# EAGLE board protoBoardHB (EAGLE 9.2.2)
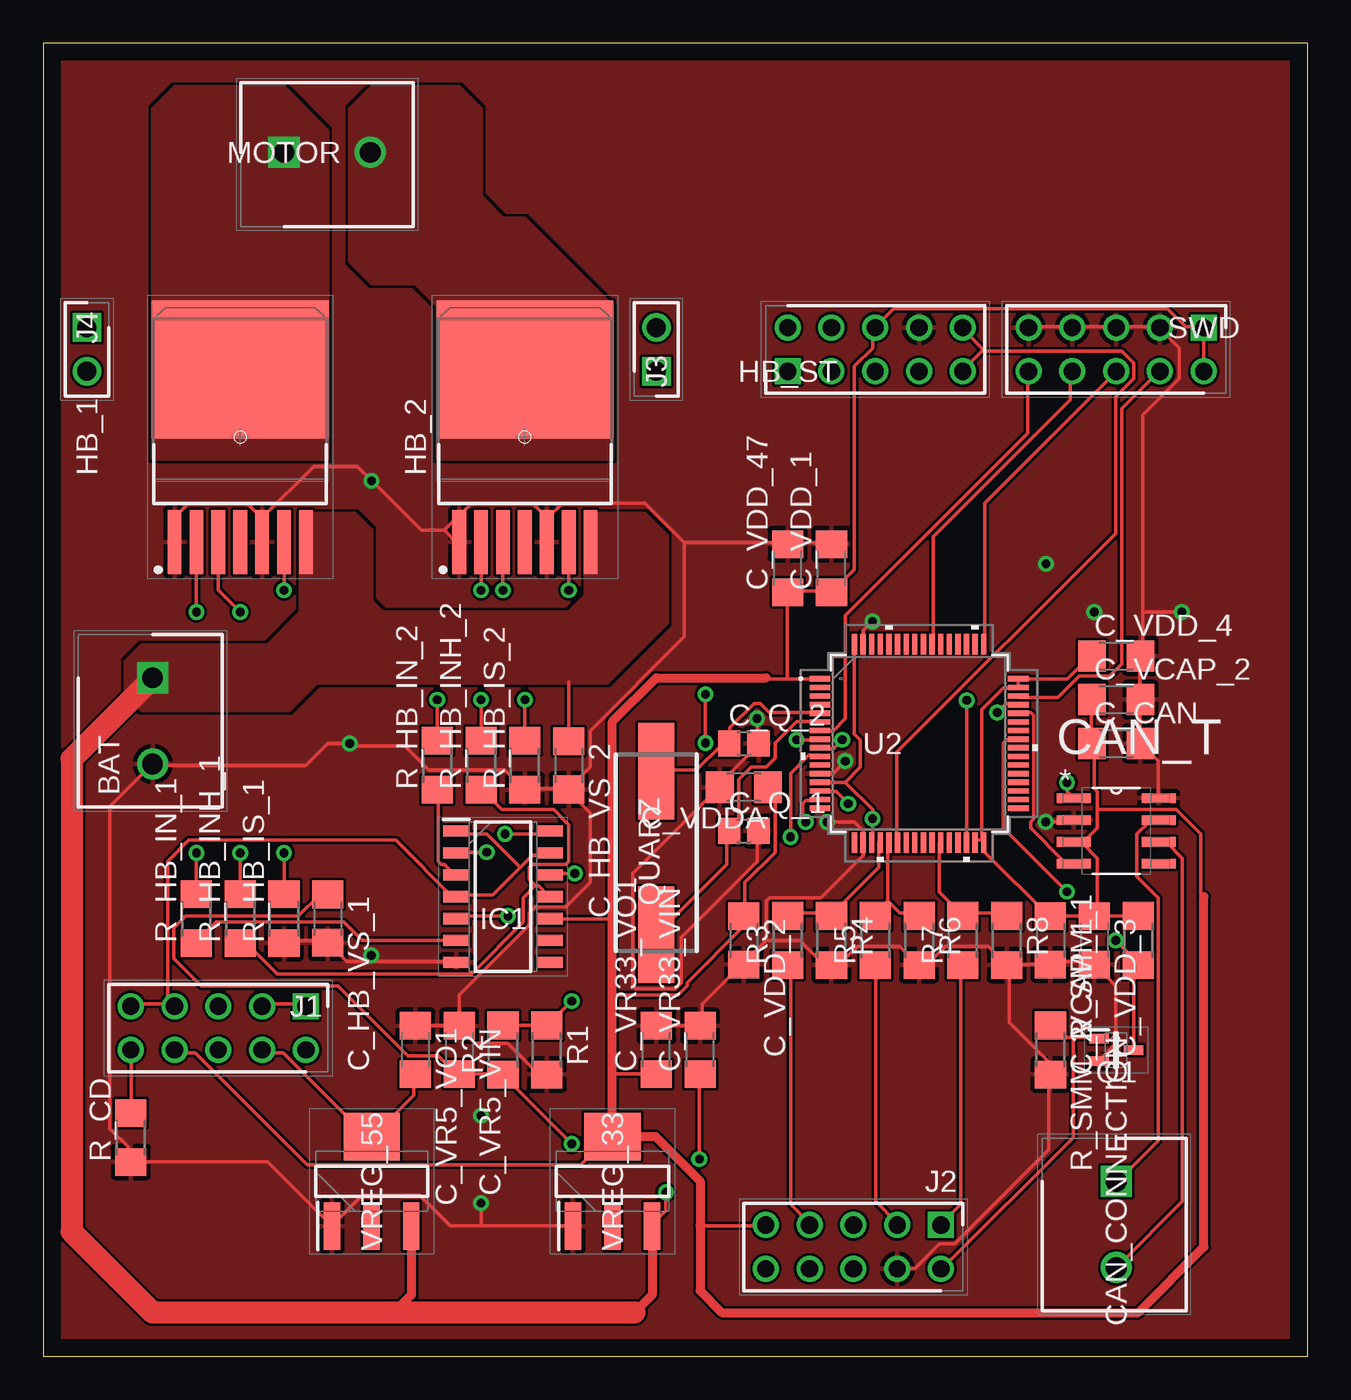
[diagram p0: board, top side]
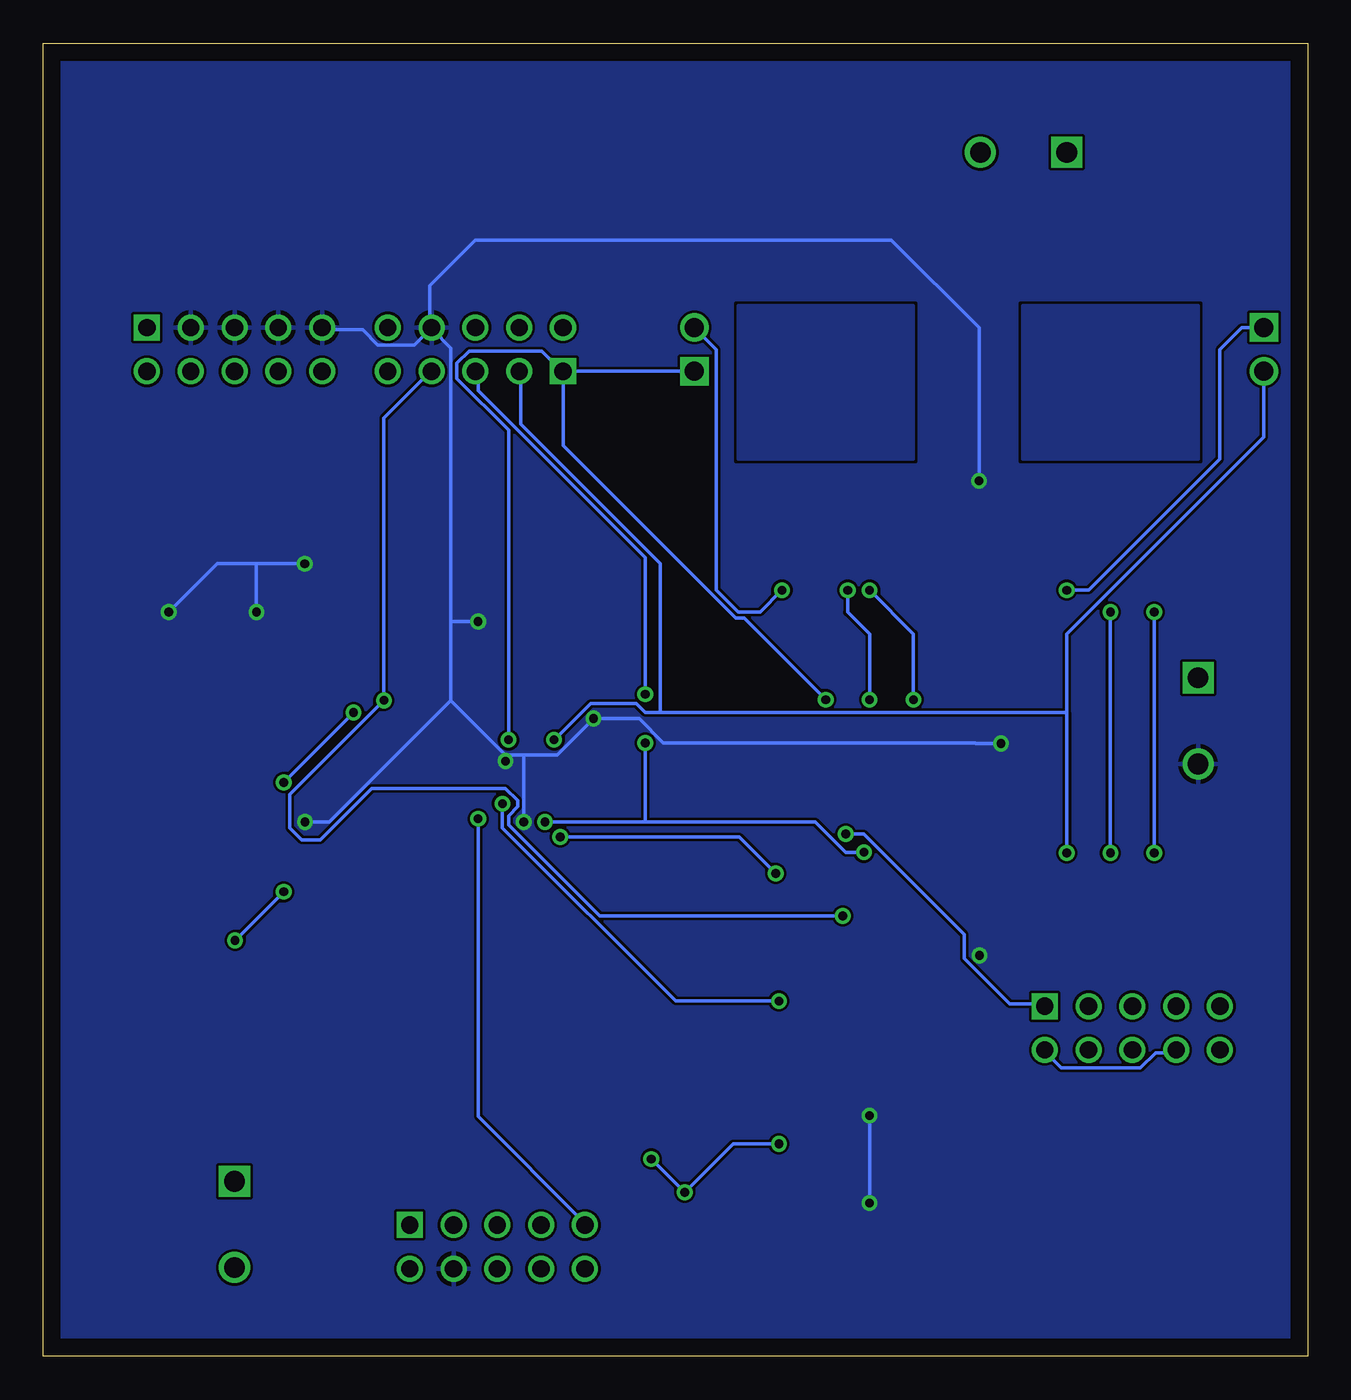
[diagram p1: board, bottom side, seen from below]

Size 73.33 x 76.19 mm. Coordinates in mm from the lower left corner, seen from the top.
Outline: 0,0 73.33,0 73.33,76.19 0,76.19 0,0
Copper layers (1*16): Top 0.035mm / dielectric 1.5mm / Bottom 0.035mm
Design rules "default": minimum track width 6mil, minimum drill 0.35mm, track to track 6mil, track to pad 6mil, pad to pad 6mil, via to via 6mil, smd to smd 6mil, copper to edge 40mil, drill to drill 6mil, minimum pad ring 10mil, minimum via ring 8mil, stop-mask expansion 4mil, vias tented up to drill 0mil, thermal gap 10mil
Net classes: 0 default: width 0.2 mm, drill 0.508 mm; 1 V12: width 0.6 mm, drill 0.8 mm

## Footprints (pad centres in the part's own frame; a part is rotated, then mirrored left to right if it is on the bottom)
SHDR2W100P0X500_1X2_1000X820X1 = drill 1.2 pad 1.8 square: 1 0,0 | drill 1.2 pad 1.8: 2 5,0
C1206 = smd 1.6 x 1.8: 1 -1.4,0; 2 1.4,0
C0805 = smd 1.3 x 1.5: 1 -0.85,0; 2 0.85,0
SOIC127P600X175-8N = smd 1.981 x 0.559: 1 -2.464,1.905; 2 -2.464,0.635; 3 -2.464,-0.635; 4 -2.464,-1.905; 5 2.464,-1.905; 6 2.464,-0.635; 7 2.464,0.635; 8 2.464,1.905
TO127P1500X440-8N = smd 3.7 x 0.8: 1 -6.1,3.81; 2 -6.1,2.54; 3 -6.1,1.27; 4 -6.1,0; 5 -6.1,-1.27; 6 -6.1,-2.54; 7 -6.1,-3.81 | smd 8 x 10.25: 8 3.9,0
HDRV10W80P254_2X5_1270X508X864 = drill 1 pad 1.5 square: 1 0,0 | drill 1 pad 1.5: 2 0,2.54; 3 2.54,0; 4 2.54,2.54; 5 5.08,0; 6 5.08,2.54; 7 7.62,0; 8 7.62,2.54; 9 10.16,0; 10 10.16,2.54
SOIC127P600X175-14N = smd 1.525 x 0.65: 1 -2.712,3.81; 2 -2.712,2.54; 3 -2.712,1.27; 4 -2.712,0; 5 -2.712,-1.27; 6 -2.712,-2.54; 7 -2.712,-3.81; 8 2.712,-3.81; 9 2.712,-2.54; 10 2.712,-1.27; 11 2.712,0; 12 2.712,1.27; 13 2.712,2.54; 14 2.712,3.81
HDRV2W64P0X254_1X2_508X254X864 = drill 1.1 pad 1.65 square: 1 0,0 | drill 1.1 pad 1.65: 2 2.54,0
SOT65P220X100-3N = smd 1.15 x 0.55: 1 -1,0.65; 2 -1,-0.65; 3 1,0
ABLS-12.000MHZ-B2 = smd 5.6 x 2.1: 1 -4.75,0; 2 4.75,0
R1206 = smd 1.6 x 1.803: 1 -1.422,0; 2 1.422,0
LQFP64-10X10MM = smd 1.194 x 0.305: 1 -5.75,3.75; 2 -5.75,3.25; 3 -5.75,2.75; 4 -5.75,2.25; 5 -5.75,1.75; 6 -5.75,1.25; 7 -5.75,0.75; 8 -5.75,0.25; 9 -5.75,-0.25; 10 -5.75,-0.75; 11 -5.75,-1.25; 12 -5.75,-1.75; 13 -5.75,-2.25; 14 -5.75,-2.75; 15 -5.75,-3.25; 16 -5.75,-3.75; 33 5.75,-3.75; 34 5.75,-3.25; 35 5.75,-2.75; 36 5.75,-2.25; 37 5.75,-1.75; 38 5.75,-1.25; 39 5.75,-0.75; 40 5.75,-0.25; 41 5.75,0.25; 42 5.75,0.75; 43 5.75,1.25; 44 5.75,1.75; 45 5.75,2.25; 46 5.75,2.75; 47 5.75,3.25; 48 5.75,3.75 | smd 0.305 x 1.194: 17 -3.75,-5.75; 18 -3.25,-5.75; 19 -2.75,-5.75; 20 -2.25,-5.75; 21 -1.75,-5.75; 22 -1.25,-5.75; 23 -0.75,-5.75; 24 -0.25,-5.75; 25 0.25,-5.75; 26 0.75,-5.75; 27 1.25,-5.75; 28 1.75,-5.75; 29 2.25,-5.75; 30 2.75,-5.75; 31 3.25,-5.75; 32 3.75,-5.75; 49 3.75,5.75; 50 3.25,5.75; 51 2.75,5.75; 52 2.25,5.75; 53 1.75,5.75; 54 1.25,5.75; 55 0.75,5.75; 56 0.25,5.75; 57 -0.25,5.75; 58 -0.75,5.75; 59 -1.25,5.75; 60 -1.75,5.75; 61 -2.25,5.75; 62 -2.75,5.75; 63 -3.25,5.75; 64 -3.75,5.75
SOT230P700X180-4N = smd 2.75 x 0.95: 1 -2.6,2.3; 2 -2.6,0; 3 -2.6,-2.3 | smd 2.75 x 3.25: 4 2.6,0

## Placement (x,y rotation side)
BAT  282836-2  [SHDR2W100P0X500_1X2_1000X820X1]  6.35,39.37 270 top
C_CAN  100nF  [C1206]  62.23,35.56 0 top
C_HB_VS_1  0.47uF  [C1206]  16.51,25.4 270 top
C_HB_VS_2  0.47uF  [C1206]  30.48,34.29 270 top
C_Q_1  22pF  [C0805]  40.64,30.48 0 top
C_Q_2  22pF  [C0805]  40.64,35.56 0 top
C_VCAP_1  2.2uF  [C1206]  58.42,24.13 270 top
C_VCAP_2  2.2uF  [C1206]  62.23,38.1 0 top
C_VDD_1  100nF  [C1206]  45.72,45.72 90 top
C_VDD_2  100nF  [C1206]  40.64,24.13 270 top
C_VDD_3  100nF  [C1206]  60.96,24.13 270 top
C_VDD_4  100nF  [C1206]  62.23,40.64 0 top
C_VDD_47  4.7nF  [C1206]  43.18,45.72 90 top
C_VDDA  100nF  [C1206]  40.64,33.02 180 top
C_VR5_VIN  1uF  [C1206]  24.13,17.78 270 top
C_VR5_VO1  4.7uF  [C1206]  21.59,17.78 270 top
C_VR33_VIN  1uF  [C1206]  38.1,17.78 90 top
C_VR33_VO1  4.7uF  [C1206]  35.56,17.78 90 top
CAN_CONNECTION  282836-2  [SHDR2W100P0X500_1X2_1000X820X1]  62.23,10.16 270 top
CAN_T  SN65HVD230QD  [SOIC127P600X175-8N]  62.23,30.48 0 top
HB_1  BTN8982TA  [TO127P1500X440-8N]  11.43,53.34 90 top
HB_2  BTN8982TA  [TO127P1500X440-8N]  27.94,53.34 90 top
HB_ST  M20-9980545  [HDRV10W80P254_2X5_1270X508X864]  43.18,57.15 0 top
IC1  CD74HCT125M  [SOIC127P600X175-14N]  26.67,26.67 0 top
J1  M20-9980545  [HDRV10W80P254_2X5_1270X508X864]  15.24,20.32 180 top
J2  M20-9980545  [HDRV10W80P254_2X5_1270X508X864]  52.07,7.62 180 top
J3  M20-9990246  [HDRV2W64P0X254_1X2_508X254X864]  35.56,57.15 90 top
J4  M20-9990246  [HDRV2W64P0X254_1X2_508X254X864]  2.54,59.69 270 top
MOTOR  282836-2  [SHDR2W100P0X500_1X2_1000X820X1]  13.97,69.85 0 top
Q1  SMMBT3904WT1G  [SOT65P220X100-3N]  62.23,17.78 0 top
QUARZ  ABLS-8.000MHZ-K4T  [ABLS-12.000MHZ-B2]  35.56,29.21 90 top
R1  [R1206]  29.21,17.78 270 top
R2  [R1206]  26.67,17.78 90 top
R3  [R1206]  43.18,24.13 90 top
R4  [R1206]  45.72,24.13 270 top
R5  [R1206]  48.26,24.13 90 top
R6  [R1206]  50.8,24.13 270 top
R7  [R1206]  53.34,24.13 90 top
R8  [R1206]  55.88,24.13 270 top
R_CD  1K  [R1206]  5.08,12.7 90 top
R_HB_IN_1  10K  [R1206]  8.89,25.4 90 top
R_HB_IN_2  10K  [R1206]  22.86,34.29 90 top
R_HB_INH_1  10K  [R1206]  11.43,25.4 90 top
R_HB_INH_2  10K  [R1206]  25.4,34.29 90 top
R_HB_IS_1  1k  [R1206]  13.97,25.4 90 top
R_HB_IS_2  1k  [R1206]  27.94,34.29 90 top
R_SMM_1  100K  [R1206]  63.5,24.13 270 top
R_SMM_2  100K  [R1206]  58.42,17.78 270 top
SWD  M20-9980545  [HDRV10W80P254_2X5_1270X508X864]  67.31,59.69 180 top
U2  STM32F4X5RG  [LQFP64-10X10MM]  50.8,35.56 0 top
VREG_33  LDL1117S33R  [SOT230P700X180-4N]  33.02,10.16 90 top
VREG_55  LDL1117S50R  [SOT230P700X180-4N]  19.05,10.16 90 top

## Library data of the parts
BAT CAN_CONNECTION MOTOR = SamacSys_Parts; DESCRIPTION: TERMINAL BLOCK, PCB MOUNT, SIDE WIRE ENTRY, STACKING , 5.00mm PITCH; HEIGHT: 10.2mm; MANUFACTURER_NAME: TE Connectivity; MANUFACTURER_PART_NUMBER: 282836-2; MOUSER_PART_NUMBER: 571-2828362
C_CAN C_HB_VS_1 C_HB_VS_2 C_Q_1 C_Q_2 C_VCAP_1 C_VCAP_2 C_VDD_1-C_VDD_4 C_VDD_47 C_VDDA C_VR5_VIN C_VR5_VO1 C_VR33_VIN C_VR33_VO1 R1-R8 R_CD R_HB_IN_1 R_HB_IN_2 R_HB_INH_1 R_HB_INH_2 R_HB_IS_1 R_HB_IS_2 R_SMM_1 R_SMM_2 = adafruit
CAN_T = ADP_Components; MF: TEXAS INSTRUMENTS; MPN: SN65HVD230QD..; OC_FARNELL: 1648752; OC_NEWARK: 75C7746; PACKAGE: SOIC-8; SUPPLIER: Texas Instruments
HB_1 HB_2 = SamacSys_Parts; DESCRIPTION: New Infineon BTN8982TA Motor Driver,, 7-Pin TO-263-7-1; HEIGHT: 4.4mm; MANUFACTURER_NAME: Infineon; MANUFACTURER_PART_NUMBER: BTN8982TA; MOUSER_PART_NUMBER: 726-BTN8982TA
HB_ST SWD = SamacSys_Parts; DESCRIPTION: M20 Header, Pin, Dil, Vertical, 5+5 W HARWIN M20 Series, 2.54mm Pitch 10 Way 2 Row Straight Pin Header, Through Hole, Solder Termination; HEIGHT: 8.64mm; MANUFACTURER_NAME: HARWIN; MANUFACTURER_PART_NUMBER: M20-9980545; MF: HARWIN; MOUSER_PART_NUMBER: 855-M20-9980545; MPN: M20-9980545; OC_FARNELL: 1022235
IC1 = SamacSys_Parts; DESCRIPTION: High Speed CMOS Logic Quad Buffers with 3-State Outputs; HEIGHT: 1.75mm; MANUFACTURER_NAME: Texas Instruments; MANUFACTURER_PART_NUMBER: CD74HCT125M; MOUSER_PART_NUMBER: 595-CD74HCT125M
J1 J2 = SamacSys_Parts; DESCRIPTION: M20 Header, Pin, Dil, Vertical, 5+5 W HARWIN M20 Series, 2.54mm Pitch 10 Way 2 Row Straight Pin Header, Through Hole, Solder Termination; HEIGHT: 8.64mm; MANUFACTURER_NAME: HARWIN; MANUFACTURER_PART_NUMBER: M20-9980545; MOUSER_PART_NUMBER: 855-M20-9980545
J3 J4 = SamacSys_Parts; DESCRIPTION: HARWIN M20-9990246. Board-To-Board Connector, Straight, 2.54 mm, 2 Contacts, Header, M20 Series, Through Hole; HEIGHT: 8.64mm; MANUFACTURER_NAME: HARWIN; MANUFACTURER_PART_NUMBER: M20-9990246; MOUSER_PART_NUMBER: 855-M20-9990246
Q1 = SamacSys_Parts; DESCRIPTION: ON SEMICONDUCTOR - SMMBT3904WT1G - TRANSISTOR, AEC-Q101, NPN, 40V, SOT-323; HEIGHT: 1mm; MANUFACTURER_NAME: ON Semiconductor; MANUFACTURER_PART_NUMBER: SMMBT3904WT1G; MOUSER_PART_NUMBER: 863-SMMBT3904WT1G
QUARZ = SamacSys_Parts; DESCRIPTION: ABRACON - ABLS-8.000MHZ-K4T - CRYSTAL, 8MHZ, 18PF, HC-49US; HEIGHT: mm; MANUFACTURER_NAME: ABRACON; MANUFACTURER_PART_NUMBER: ABLS-8.000MHZ-K4T; MF: ABRACON; MOUSER_PART_NUMBER: 815-ABLS-8.0MK4-T; MPN: ABLS-8.000MHZ-K4T; OC_FARNELL: 2467758
U2 = ADP_Components; MANUFACTURER_PART_NUMBER: STM32F4X5RG; OC_FARNELL: unknown; VENDOR: STMicroelectronics
VREG_33 = SamacSys_Parts; DESCRIPTION: STMICROELECTRONICS - LDL1117S33R - LDO, FIXED, 3.3V, 1.2A, SOT-223-3; HEIGHT: 1.8mm; MANUFACTURER_NAME: STMicroelectronics; MANUFACTURER_PART_NUMBER: LDL1117S33R; MF: STMICROELECTRONICS; MOUSER_PART_NUMBER: 511-LDL1117S33R; MPN: LDL1117S33R; OC_FARNELL: 2729708
VREG_55 = SamacSys_Parts; DESCRIPTION: STMICROELECTRONICS - LDL1117S50R - LDO, FIXED, 5V, 1.2A, SOT-223-3; HEIGHT: 1.8mm; MANUFACTURER_NAME: STMicroelectronics; MANUFACTURER_PART_NUMBER: LDL1117S50R; MF: STMICROELECTRONICS; MOUSER_PART_NUMBER: 511-LDL1117S50R; MPN: LDL1117S50R; OC_FARNELL: 2729709

## Nets
CAN1_RX: CAN_T.4 U2.44
CAN1_TX: CAN_T.1 U2.45
CANH: CAN_CONNECTION.1 CAN_T.7
CANL: CAN_CONNECTION.2 CAN_T.6
CD_EN: IC1.1 IC1.4 IC1.13 J1.7 J1.9
CD_VCC: IC1.14 J1.1 J1.3
GND: BAT.2 C_CAN.2 C_HB_VS_1.2 C_HB_VS_2.2 C_Q_1.2 C_Q_2.2 C_VCAP_1.2 C_VCAP_2.2 C_VDD_1.2 C_VDD_2.2 C_VDD_3.2 C_VDD_4.2 C_VDD_47.2 C_VDDA.2 C_VR5_VIN.1 C_VR5_VO1.1 C_VR33_VIN.2 C_VR33_VO1.2 CAN_T.2 CAN_T.8 HB_1.1 HB_1.5 HB_2.1 HB_2.5 HB_ST.8 IC1.7 J2.4 Q1.2 R1.2 R4.2 R6.2 R8.2 R_CD.1 R_HB_IS_1.1 R_HB_IS_2.1 R_SMM_2.2 SWD.3 SWD.5 SWD.7 SWD.9 U2.12 U2.18 U2.63 VREG_33.1 VREG_55.1
IN_1: IC1.6 R_HB_IN_1.1
IN_2: IC1.3 R_HB_IN_2.1
IN_M_1: HB_ST.7 IC1.5 U2.30
IN_M_2: HB_ST.5 IC1.2 U2.15
INH: IC1.11 R_HB_INH_1.1 R_HB_INH_2.1
INH_EXT: HB_ST.9 HB_ST.10 U2.22
INH_M: IC1.12 U2.10
IS_1: HB_ST.3 J4.2 R_HB_IS_1.2 U2.8
IS_2: HB_ST.1 J3.1 R_HB_IS_2.2 U2.9
N$1: J1.10 R_CD.2
N$2: HB_2.6 J3.2
N$3: HB_1.2 R_HB_IN_1.2
N$4: HB_1.3 R_HB_INH_1.2
N$5: HB_2.2 R_HB_IN_2.2
N$6: HB_2.3 R_HB_INH_2.2
N$7: HB_1.6 J4.1
N$8: HB_ST.2
N$9: HB_ST.4
N$15: J2.6
N$16: J2.8
N$17: J2.10
NRST: SWD.10 U2.7
OSC_IN: C_Q_2.1 QUARZ.2 U2.5
OSC_OUT: C_Q_1.1 QUARZ.1 U2.6
OUT_PA4: J2.7 R3.1
OUT_PA5: J2.3 R5.1
OUT_PA6: J2.5
OUT_PB1: J2.1 R7.1
PA0: R1.1 R2.2 U2.14
PA4: R3.2 R4.1 U2.20
PA5: R5.2 R6.1 U2.21
PA8: Q1.3 R_SMM_1.2 U2.41
PB1: R7.2 R8.1 U2.27
SS_VN: J2.2 Q1.1 R_SMM_2.1
SWCLK: SWD.6 U2.49
SWDIO: SWD.4 U2.46
TRACESWO: SWD.8 U2.55
V5: C_VR5_VO1.2 J1.4 VREG_55.4
V12: BAT.1 C_HB_VS_1.1 C_HB_VS_2.1 C_VR5_VIN.2 C_VR33_VIN.1 HB_1.7 HB_2.7 R2.1 VREG_33.3 VREG_55.3
V33: C_CAN.1 C_VCAP_1.1 C_VCAP_2.1 C_VDD_1.1 C_VDD_2.1 C_VDD_3.1 C_VDD_4.1 C_VDD_47.1 C_VDDA.1 C_VR33_VO1.1 CAN_T.3 HB_ST.6 IC1.10 J1.2 J1.8 J2.9 R_SMM_1.1 SWD.1 SWD.2 U2.1 U2.13 U2.19 U2.31 U2.32 U2.47 U2.48 U2.64 VREG_33.4
V_MOT_MIN: HB_2.8 MOTOR.2
V_MOT_PL: HB_1.8 MOTOR.1

## Tracks (layer width: path | path; a pad name or v marks a point on that pad's centre or on a via)
CAN1_RX
  Top 0.2: U2.44 56.56,37.35 57.27,37.35 57.44,37.18 57.44,31.19 57.27,31.01 57.27,30.66 59.2,28.72 59.73,28.72 CAN_T.4
CAN1_TX  (via drill 0.51)
  Top 0.2: v55.33,37.35 55.85,37.88 56.38,37.88 U2.45 | v59.38,33.3 59.38,32.77 59.73,32.42 CAN_T.1
  Bottom 0.2: v59.38,33.3 v55.33,37.35
CANH
  Top 0.2: CAN_T.7 64.67,31.01 64.14,31.01 63.43,30.31 63.43,27.84 64.67,26.61 64.67,12.51 62.38,10.22 CAN_CONNECTION.1
CANL
  Top 0.2: CAN_T.6 64.84,29.78 65.19,29.78 66.08,28.9 66.08,8.99 62.38,5.29 CAN_CONNECTION.2
CD_EN
  Top 0.2: 7.22,20.44 7.58,20.44 J1.7 7.22,20.44 | 7.22,20.44 5.11,20.44 J1.9 | 27.66,28.37 28.37,29.07 29.25,29.07 IC1.13 | 27.66,28.37 26.08,26.78 23.96,26.78 IC1.4 23.79,26.61 20.44,29.95 8.46,29.95 7.22,28.72 7.22,20.44 | 27.66,28.37 25.73,30.31 23.96,30.31 IC1.1
CD_VCC  (via drill 0.51)
  Top 0.2: v26.78,30.31 29.25,30.31 IC1.14 | J1.3 12.86,20.44 15.15,20.44 J1.1
  Bottom 0.2: v26.78,30.31 25.73,30.31 19.91,24.49 19.91,23.08 17.27,20.44 15.33,20.44 J1.1
GND  (via drill 0.51)
  Top 0.2: 12.69,48.63 11.8,49.51 8.46,49.51 7.75,48.81 7.75,47.4 HB_1.1 | 12.69,48.63 12.69,47.4 HB_1.5 12.69,48.63 | HB_2.1 23.96,47.22 23.26,47.93 24.84,49.51 28.37,49.51 29.25,48.63 | C_VDD_1.2 45.64,47.22 43.34,47.22 C_VDD_47.2 43.17,47.22 37.18,47.22 | 37.18,47.22 34.89,49.51 30.13,49.51 29.25,48.63 | 29.25,48.63 29.25,47.4 HB_2.5 29.25,48.63 | 12.69,48.63 15.68,51.63 | 16.74,7.58 13.04,11.28 5.11,11.28 R_CD.1 4.93,11.45 4.93,12.16 3.88,13.21 3.88,31.89 BAT.2 6.52,34.53 | 16.74,7.58 18.5,9.34 21.85,9.34 23.61,7.58 25.4,7.58 30.66,7.58 VREG_33.1 | 16.74,7.58 VREG_55.1 | 19.03,22.91 17.62,22.91 16.56,23.96 C_HB_VS_1.2 16.39,24.14 14.1,24.14 R_HB_IS_1.1 | 19.03,22.91 23.79,22.91 IC1.7 | C_VR5_VO1.1 21.67,19.21 23.96,19.21 C_VR5_VIN.1 | R1.2 29.07,16.39 28.72,16.39 26.96,18.15 25.02,18.15 24.14,19.03 C_VR5_VIN.1 | 20.97,35.42 22.38,34.01 26.78,34.01 27.84,32.95 R_HB_IS_2.1 28.02,32.95 30.31,32.95 C_HB_VS_2.2 | C_VR5_VIN.1 24.14,19.21 24.14,20.97 28.19,25.02 28.19,25.73 28.54,26.08 30.31,26.08 31.72,27.49 31.72,31.54 30.48,32.77 C_HB_VS_2.2 | v19.03,23.26 19.03,22.91 | 37.18,47.22 37.18,41.76 31.72,36.3 31.72,34.18 30.48,32.95 C_HB_VS_2.2 | C_VR33_VO1.2 35.59,19.21 38.06,19.21 C_VR33_VIN.2 38.23,19.21 38.23,20.44 40.53,22.73 C_VDD_2.2 40.7,22.91 41.94,24.14 | 41.94,24.14 41.94,26.43 42.11,26.61 45.11,26.61 47.57,29.07 47.57,29.78 U2.18 47.57,29.95 47.57,30.48 47.05,31.01 v45.46,31.01 | 41.94,24.14 43.87,24.14 45.28,22.73 45.64,22.73 R4.2 45.81,22.73 46.16,22.73 47.22,23.79 49.69,23.79 50.75,22.73 R6.2 50.92,22.73 51.27,22.73 52.33,23.79 54.8,23.79 55.85,22.73 R8.2
  Top 0.2: Q1.2 61.32,17.27 62.2,18.15 62.2,21.5 C_VDD_3.2 60.79,22.91 58.5,22.91 C_VCAP_1.2 58.32,22.73 56.03,22.73 R8.2 | R8.2 56.03,22.55 56.03,19.38 58.32,17.09 58.32,16.39 R_SMM_2.2 58.32,16.21 58.32,11.98 52.86,6.52 51.98,6.52 50.57,5.11 49.69,5.11 J2.4 | CAN_T.8 64.67,32.42 64.67,34.53 63.78,35.42 C_CAN.2 63.61,35.59 63.61,38.06 C_VCAP_2.2 63.61,38.23 63.61,40.53 C_VDD_4.2 63.78,40.7 63.78,43.18 63.78,54.62 65.9,56.74 65.9,58.5 64.84,59.56 SWD.3 64.67,59.73 62.38,59.73 SWD.5 62.2,59.73 59.73,59.73 SWD.7 59.56,59.73 57.27,59.73 SWD.9 | C_Q_1.2 41.41,30.31 41.41,28.72 37,24.32 37,21.67 36.65,21.32 34.36,21.32 34.18,21.5 34.18,28.02 39.12,32.95 C_VDDA.2 39.12,33.13 41.41,35.42 C_Q_2.2 41.41,35.59 v41.41,37 | v46.52,34.53 45.81,33.83 45.11,33.83 U2.12 | v48.1,42.64 47.57,42.11 47.57,41.41 U2.63 | v58.15,31.01 59.73,31.01 CAN_T.2
  Top 0.203: 15.68,51.63 18.22,51.63 v19.05,50.8 21.92,47.93 23.26,47.93 | BAT.2 6.43,34.29 15.24,34.29 16.51,35.56 v17.78,35.56 17.92,35.42 20.97,35.42 | 63.78,43.18 v66.04,43.18 | 25.4,7.58 v25.4,8.89
  Bottom 0.2: 49.69,38.06 46.52,34.89 | 49.69,42.64 49.69,58.5 50.75,59.56 HB_ST.8 50.92,59.56 51.8,58.67 53.92,58.67 54.8,59.56 57.09,59.56 SWD.9 | 49.69,42.64 49.69,38.06 | 49.69,42.64 v48.1,42.64 | v58.15,31.01 56.74,31.01 49.69,38.06 | 46.52,34.89 45.46,34.89 | 45.46,34.89 43.52,34.89 v41.41,37 38.76,37 37.35,35.59 | 46.52,34.89 v46.52,34.53 | 45.46,34.89 v45.46,31.01
  Bottom 0.203: 37.35,35.59 19.27,35.59 19.24,35.56 v17.78,35.56 | 50.92,59.56 50.92,62.11 48.26,64.77 24.13,64.77 19.05,59.69 v19.05,50.8 | v66.04,43.18 63.24,45.98 60.96,45.98 | 60.96,45.98 v58.16,45.98 | v25.4,8.89 v25.4,13.97 | 60.96,45.98 v60.96,43.18
  pour Top (rank 2): -1.27,77.47 -1.27,-1.27 74.93,-1.27 74.93,77.47
  pour Bottom (rank 2): -2.54,78.74 -2.54,-2.54 76.2,-2.54 76.2,78.74
IN_1
  Top 0.2: IC1.6 23.79,24.14 18.5,24.14 17.44,25.2 10.04,25.2 8.99,24.14 R_HB_IN_1.1
IN_2
  Top 0.2: IC1.3 23.79,28.02 23.26,28.54 23.08,28.54 22.91,28.72 22.91,32.77 R_HB_IN_2.1
IN_M_1  (via drill 0.51)
  Top 0.2: v53.56,38.06 53.56,29.95 U2.30 | v26.96,25.55 23.96,25.55 IC1.5
  Bottom 0.2: HB_ST.7 50.92,57.09 53.56,54.45 v53.56,38.06 59.03,32.6 59.03,30.66 58.32,29.95 57.27,29.95 54.27,32.95 46.52,32.95 45.81,32.24 45.81,31.89 46.34,31.36 46.34,30.84 41.05,25.55 v26.96,25.55
IN_M_2  (via drill 0.51)
  Top 0.2: v44.23,31.01 44.05,31.19 44.05,32.07 44.23,32.24 44.93,32.24 U2.15 | v25.73,29.25 23.96,29.25 IC1.2 | v38.41,35.59 v38.41,38.41
  Bottom 0.2: 38.41,31.01 28.54,31.01 26.78,29.25 v25.73,29.25 | 38.41,31.01 v44.23,31.01 | v38.41,38.41 38.41,46.34 48.1,56.03 48.1,57.09 HB_ST.5 | 38.41,31.01 v38.41,35.59
INH
  Top 0.2: 28.54,27.31 28.72,27.31 29.25,26.78 IC1.11 | 28.54,27.31 28.19,27.66 28.19,28.37 28.37,28.54 30.31,28.54 30.48,28.72 30.48,30.84 29.6,31.72 26.61,31.72 25.55,32.77 R_HB_INH_2.1 | 28.54,27.31 27.84,26.61 27.84,25.2 24.84,22.2 13.57,22.2 11.8,23.96 11.45,23.96 R_HB_INH_1.1
INH_EXT
  Top 0.2: 54.62,58.32 54.45,58.32 53.39,57.27 HB_ST.9 | 54.62,58.32 62.55,58.32 63.26,57.62 63.26,56.74 62.2,55.68 62.2,47.75 49.51,35.06 49.51,29.95 U2.22 | 54.62,58.32 53.39,59.56 HB_ST.10
INH_M  (via drill 0.51)
  Top 0.2: v43.34,30.13 43.34,33.83 44.4,34.89 44.93,34.89 U2.10 | v30.84,28.02 29.43,28.02 IC1.12
  Bottom 0.2: v43.34,30.13 32.95,30.13 v30.84,28.02
IS_1  (via drill 0.51)
  Top 0.2: v43.7,35.77 44.93,35.77 U2.8
  Top 0.203: v13.97,29.21 R_HB_IS_1.2
  Bottom 0.2: v43.7,35.77 41.58,37.88 38.94,37.88 38.41,37.35 37.53,37.35 | 37.53,37.35 13.97,37.35 13.97,41.91 2.54,53.34 J4.2 | 37.53,37.35 37.53,45.99 45.64,54.09 45.64,57.09 HB_ST.3
  Bottom 0.203: 13.97,37.35 v13.97,29.21
IS_2  (via drill 0.51)
  Top 0.2: v46.34,35.77 45.81,35.24 45.11,35.24 U2.9
  Top 0.203: v27.94,38.1 R_HB_IS_2.2
  Bottom 0.2: v46.34,35.77 46.34,53.74 49.34,56.74 49.34,57.62 48.63,58.32 44.4,58.32 43.34,57.27 HB_ST.1 | 43.17,57.09 HB_ST.1 | J3.1 HB_ST.1 | v27.94,38.1 32.67,42.83 33.17,42.83 43.18,52.84 HB_ST.1
N$1
  Top 0.2: R_CD.2 5.11,14.27 5.11,17.62 J1.10
N$2  (via drill 0.51)
  Top 0.2: HB_2.6 v30.48,44.45
  Bottom 0.2: v30.48,44.45 31.75,43.18 33.02,43.18 34.29,44.45 34.29,58.42 J3.2
N$3  (via drill 0.51)
  Top 0.203: R_HB_IN_1.2 v8.89,29.21 | v8.89,43.18 HB_1.2
  Bottom 0.203: v8.89,29.21 v8.89,43.18
N$4  (via drill 0.51)
  Top 0.203: R_HB_INH_1.2 v11.43,29.21 | v11.43,43.18 10.16,44.45 HB_1.3
  Bottom 0.203: v11.43,29.21 v11.43,43.18
N$5  (via drill 0.51)
  Top 0.203: HB_2.2 v25.4,44.45 | v22.86,38.1 R_HB_IN_2.2
  Bottom 0.203: v25.4,44.45 22.86,41.91 v22.86,38.1
N$6  (via drill 0.51)
  Top 0.203: HB_2.3 v26.67,44.45 | v25.4,38.1 R_HB_INH_2.2
  Bottom 0.203: v26.67,44.45 26.67,43.18 25.4,41.91 v25.4,38.1
N$7  (via drill 0.51)
  Top 0.2: HB_1.6 v13.97,44.45
  Bottom 0.2: v13.97,44.45 12.7,44.45 5.08,52.07 5.08,58.42 3.81,59.69 J4.1
NRST
  Top 0.2: U2.7 45.11,36.3 45.81,36.3 46.52,37 46.52,42.99 57.09,53.56 57.09,57.09 SWD.10
OSC_IN
  Top 0.2: U2.5 44.93,37.35 42.11,37.35 41.58,37.88 41.23,37.88 39.82,36.47 39.82,35.59 C_Q_2.1 39.65,35.42 39.29,35.42 37.88,34.01 35.59,34.01 QUARZ.2
OSC_OUT
  Top 0.2: U2.6 44.93,36.83 43.7,36.83 42.46,35.59 42.46,34.71 41.94,34.18 41.05,34.18 40.35,33.48 40.35,31.01 39.82,30.48 C_Q_1.1 39.65,30.31 39.65,28.54 35.59,24.49 QUARZ.1
OUT_PA4
  Top 0.2: R3.1 43.34,22.55 43.34,8.81 44.4,7.75 J2.7
OUT_PA5
  Top 0.2: R5.1 48.28,22.55 48.28,8.99 49.51,7.75 J2.3
OUT_PB1
  Top 0.2: R7.1 53.21,22.55 53.21,8.81 52.16,7.75 J2.1
PA0  (via drill 0.51)
  Top 0.2: v46.69,32.07 45.99,32.77 45.11,32.77 U2.14 | v30.66,20.61 29.25,19.21 R1.1 29.07,19.21 26.78,19.21 R2.2
  Bottom 0.2: v46.69,32.07 46.69,30.66 36.65,20.61 v30.66,20.61
PA4
  Top 0.2: U2.20 48.45,29.78 48.45,28.37 45.81,25.73 R4.1 45.64,25.73 43.34,25.73 R3.2
PA5
  Top 0.2: 48.98,26.43 48.98,29.78 U2.21 | 48.98,26.43 48.28,25.73 R5.2 | 48.98,26.43 49.69,25.73 50.75,25.73 R6.1
PA8  (via drill 0.51)
  Top 0.2: Q1.3 63.26,17.8 63.26,22.38 63.43,22.55 R_SMM_1.2 63.61,22.73 v62.2,24.14 | v59.38,26.96 55.68,30.66 55.68,35.59 55.85,35.77 56.38,35.77 U2.41
  Bottom 0.2: v62.2,24.14 v59.38,26.96
PB1
  Top 0.2: U2.27 51.98,29.78 51.98,26.96 53.21,25.73 R7.2 53.39,25.73 55.85,25.73 R8.1
SS_VN
  Top 0.2: 59.73,18.5 59.03,18.5 58.5,19.03 R_SMM_2.1 | 59.73,18.5 61.14,18.5 Q1.1 | 59.73,18.5 59.73,12.69 52.16,5.11 J2.2
SWCLK
  Top 0.2: U2.49 54.62,41.41 54.62,49.51 62.2,57.09 SWD.6
SWDIO
  Top 0.2: U2.46 56.56,38.23 58.85,38.23 60.08,39.47 61.85,39.47 62.55,40.17 62.55,54.97 64.67,57.09 SWD.4
TRACESWO
  Top 0.2: U2.55 51.63,41.41 51.63,47.57 59.56,55.5 59.56,57.09 SWD.8
V5
  Top 0.2: C_VR5_VO1.2 21.5,16.21 21.5,15.15 19.21,12.86 VREG_55.4 19.03,12.86 18.68,12.86 13.92,17.62 12.86,17.62 J1.4
V12  (via drill 0.51)
  Top 0.2: C_HB_VS_1.1 16.39,26.78 16.03,26.78 14.8,25.55 8.28,25.55 7.58,24.84 7.58,23.08 9.16,21.5 17.09,21.5 21.14,17.44 22.91,17.44 23.96,16.39 C_VR5_VIN.2 26.61,16.39 R2.1 26.78,16.21 v30.66,12.33 | v38.06,11.45 38.06,16.21 C_VR33_VIN.1 | v36.12,9.52 36.12,8.46 35.42,7.75 VREG_33.3 | 30.48,39.12 30.48,35.77 C_HB_VS_2.1
  Top 0.508: VREG_33.3 35.32,3.57 34.29,2.54 | VREG_55.3 21.35,3.57 20.32,2.54
  Top 1.27: BAT.1 1.65,34.67 1.65,7.24 6.35,2.54 20.32,2.54 34.29,2.54
  Bottom 0.2: v38.06,11.45 v36.12,9.52 33.3,12.33 v30.66,12.33
  pour Top (isolate 0.025, no thermals): 14.92,48.9 14.92,43.18 13.02,41.27 5.71,41.27 4.76,40.32 4.76,38.42 5.71,37.47 14.29,37.47 15.88,39.05 32.7,39.05 36.2,42.55 36.2,47.62 34.92,48.9 31.75,48.9 31.43,48.58 31.43,44.13 30.48,43.18 19.68,43.18 19.05,43.81 19.05,47.94 18.1,48.9
V33  (via drill 0.51)
  Top 0.2: 56.56,39.29 56.56,38.94 U2.47 56.38,38.76 55.68,38.76 54.45,37.53 54.45,29.95 | 56.56,39.29 59.38,39.29 60.79,40.7 C_VDD_4.1 | 56.56,39.29 U2.48 | C_VCAP_2.1 60.79,38.06 60.79,35.59 C_CAN.1 60.97,35.42 60.97,32.95 61.14,32.77 61.14,31.72 | 54.45,29.95 54.09,29.95 U2.31 | C_VDD_3.1 60.79,25.55 58.5,25.55 C_VCAP_1.1 58.32,25.55 54.62,29.25 54.62,29.78 U2.32 54.45,29.95 | 61.14,25.55 60.97,25.55 C_VDD_3.1 | 61.14,25.55 63.43,25.55 R_SMM_1.1 | 60.26,29.78 59.91,29.78 CAN_T.3 60.26,29.78 | 60.26,29.78 61.14,28.9 61.14,25.55 | 61.14,25.55 C_VDD_3.1 | 61.14,31.72 61.14,30.66 60.26,29.78 | 46.52,33.3 45.11,33.3 U2.13 | 46.52,33.3 48.1,31.72 v48.1,31.19 48.1,29.95 U2.19 | 46.52,33.3 47.4,34.18 47.4,35.77 47.05,36.12 47.05,41.23 U2.64 | C_VDDA.1 42.11,32.95 42.46,32.6 42.46,29.25 40.7,27.49 40.7,25.55 C_VDD_2.1 40.53,25.37 40.53,24.84 37.35,21.67 37.35,21.5 36.83,20.97 33.02,20.97 | SWD.2 67.31,57.27 67.31,59.56 SWD.1 67.31,59.73 66.25,59.73 65.19,60.79 49.34,60.79 48.28,59.73 HB_ST.6 48.1,59.56 48.1,58.5 47.05,57.44 47.05,45.64 45.81,44.4 C_VDD_1.1 45.64,44.4 43.34,44.4 C_VDD_47.1 43.17,44.23 43.17,39.29 | 43.17,39.29 42.11,39.29 41.91,39.37 | 43.17,39.29 44.93,39.29 U2.1 | 33.02,25.37 29.43,25.37 IC1.10 | 33.02,16.39 35.42,16.39 C_VR33_VO1.1 | 38.1,7.58 41.76,7.58 J2.9 | J1.8 7.75,17.62 8.81,17.62 15.33,11.1 31.19,11.1 32.77,12.69 VREG_33.4 | 61.14,31.72 65.72,31.72 67.13,30.31 67.13,26.78 67.31,26.67
  Top 0.508: 41.91,39.37 35.56,39.37 33.02,36.83 33.02,25.37 33.02,20.97 33.02,16.39 VREG_33.4 35.5,12.76 38.1,10.16 38.1,7.58 38.1,3.81 39.37,2.54 63.5,2.54 67.31,6.35 67.31,26.67
  Bottom 0.2: J1.8 7.75,17.62 8.81,17.62 9.69,16.74 14.27,16.74 15.15,17.62 J1.2 | v48.1,31.19 48.1,13.92 41.94,7.75 J2.9
V_MOT_MIN
  pour Top (isolate 0.025, no thermals): 19.05,73.66 17.78,72.39 17.78,63.5 19.05,62.23 21.59,62.23 22.86,60.96 22.86,52.07 33.02,52.07 33.02,60.96 27.94,66.04 26.67,66.04 25.4,67.31 25.4,72.39 24.13,73.66
  pour Bottom: 22.86,60.96 22.86,52.07 33.02,52.07 33.02,60.96
V_MOT_PL
  pour Top (isolate 0.025, no thermals): 13.97,73.66 16.51,71.12 16.51,52.07 6.35,52.07 6.35,72.39 7.62,73.66
  pour Bottom: 6.35,60.96 6.35,52.07 16.51,52.07 16.51,60.96